# EAGLE board Y-babies ATtiny84 v03 (EAGLE 6.5.0)
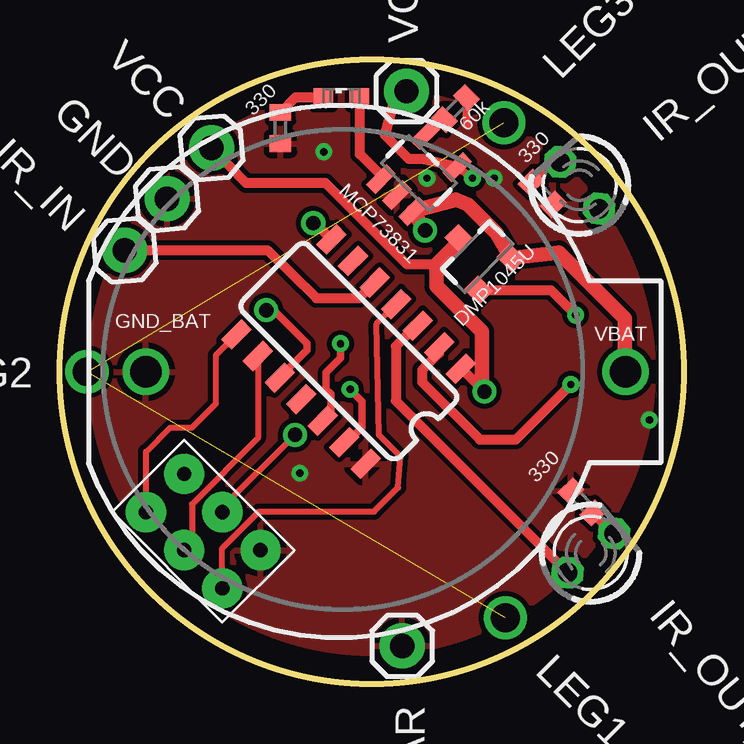
[diagram p0: board, top side]
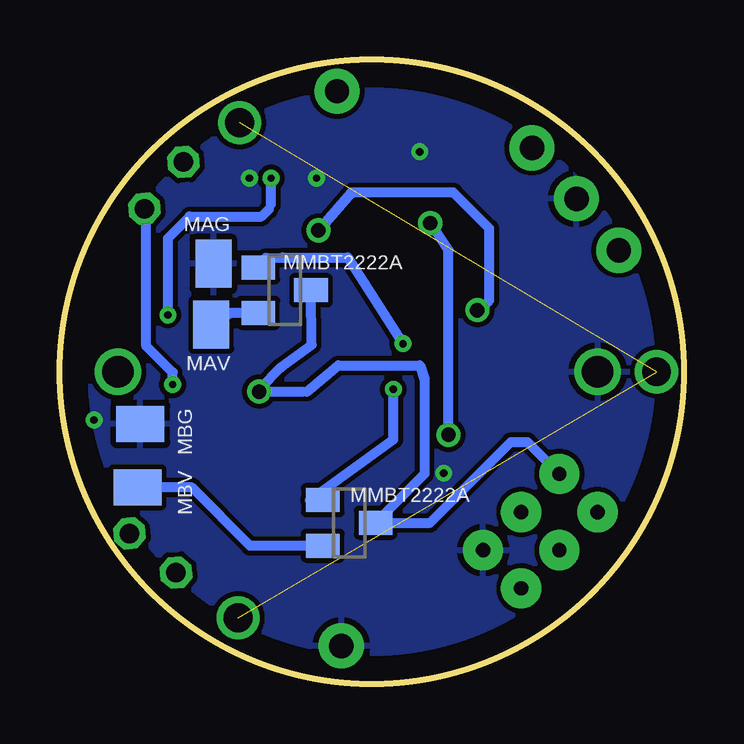
[diagram p1: board, bottom side, seen from below]

Size 26 x 26 mm. Coordinates in mm from the lower left corner, seen from the top.
Outline: circle at 13,13 radius 13
Copper layers (1*16): Top 0.035mm / dielectric 1.5mm / Bottom 0.035mm
Design rules "default": minimum track width 10mil, minimum drill 24mil, track to track 8mil, track to pad 8mil, pad to pad 8mil, via to via 8mil, smd to smd 8mil, copper to edge 40mil, drill to drill 8mil, minimum pad ring 10mil, minimum via ring 8mil, stop-mask expansion 4mil, vias tented up to drill 0mil, thermal gap 10mil

## Footprints (pad centres in the part's own frame; a part is rotated, then mirrored left to right if it is on the bottom)
BATTCOM_20MM_PTH = drill 1.3: 1 11.85,0; 2 -8.15,0
SOT23-3 = smd 0.8 x 0.9: 1 -0.95,-1; 2 0.95,-1; 3 0,1.1
1X01 = drill 1.016 pad 1.88: 1 0,0
LED3MM = drill 0.813 octagon: A -1.27,0; K 1.27,0
SML0603 = smd 0.8 x 0.8: A 0.75,0; C -0.75,0
SOT23 = smd 1 x 1.4: 1 -0.95,-1.1; 2 0.95,-1.1; 3 0,1.1
PAD-1.5X4.5 = smd 1.5 x 2: P$1 0,0
R0402 = smd 0.7 x 0.9: 1 -0.65,0; 2 0.65,0
SOT23-5 = smd 0.55 x 1.2: 1 -0.95,-1.3; 2 0,-1.3; 3 0.95,-1.3; 4 0.95,1.3; 5 -0.95,1.3
SO14 = smd 0.6 x 1.2: 1 -3.81,-2.8; 2 -2.54,-2.8; 3 -1.27,-2.8; 4 0,-2.8; 5 1.27,-2.8; 6 2.54,-2.8; 7 3.81,-2.8; 8 3.81,2.8; 9 2.54,2.8; 10 1.27,2.8; 11 0,2.8; 12 -1.27,2.8; 13 -2.54,2.8; 14 -3.81,2.8
POGO_PIN_SPI_PAD = drill 0.6 pad 1.676: GND 1,-1; MISO 3.25,-5.5; MOSI 1,-3.25; RST 3.25,-1; SCK 3.25,-3.25; VCC 1,-5.5

## Placement (x,y rotation side)
BAT1  LIR2032  [BATTCOM_20MM_PTH]  11.73,13 0 top
DMP1045U  MOSFET-PCHANNELSMD  [SOT23-3]  17.42,17.78 45 top
GND  M01PTH  [1X01]  4.46,20.22 5 top
GND_BAR  M01PTH  [1X01]  14.27,1.57 0 top
IR_IN  M01PTH  [1X01]  2.7,18.06 5 top
IR_OUT_A  [LED3MM]  22.13,5.44 40 top
IR_OUT_B  [LED3MM]  21.67,20.77 130 top
LED1  [SML0603]  11.73,24.43 0 top
MMBT2222A_L  [SOT23]  13.94,6.7 270 bottom
MMBT2222A_R  [SOT23]  16.63,16.4 270 bottom
MOT_1_A  M01SMD-4.5X1.5  [PAD-1.5X4.5]  22.65,10.82 270 bottom
MOT_1_B  M01SMD-4.5X1.5  [PAD-1.5X4.5]  22.77,8.18 270 bottom
MOT_2_A  M01SMD-4.5X1.5  [PAD-1.5X4.5]  19.69,14.96 0 bottom
MOT_2_B  M01SMD-4.5X1.5  [PAD-1.5X4.5]  19.6,17.51 0 bottom
R1  330  [R0402]  21.77,7.57 135 top
R2  330  [R0402]  20.11,20.44 315 top
R3  330  [R0402]  9.19,23.16 270 top
R4  60k  [R0402]  16.49,23.97 45 top
U1  MCP73831  [SOT23-5]  14.97,21.28 315 top
U$1  ATTINY84  [SO14]  12.04,13.84 135 top
U$2  POGO_PIN_SPI_PAD  [POGO_PIN_SPI_PAD]  9.77,5.56 225 top
VCC  M01PTH  [1X01]  6.32,22.33 5 top
VCC_BAR  M01PTH  [1X01]  14.45,24.7 0 top

## Library data of the parts
BAT1 = SparkFun-Electromechanical
DMP1045U = SparkFun-DiscreteSemi
GND GND_BAR IR_IN MMBT2222A_L MMBT2222A_R MOT_1_A MOT_1_B MOT_2_A MOT_2_B VCC VCC_BAR = SparkFun
IR_OUT_A IR_OUT_B LED1 = led
R1-R4 = resistor
U1 = SparkFun-PowerIC; PROD_ID: IC-09995
U$1 = SparkFun-DigitalIC
U$2 = Random parts

## Nets
5V: DMP1045U.1 U1.4 VCC_BAR.1
GND: BAT1.2 GND.1 GND_BAR.1 MOT_1_A.P$1 MOT_2_B.P$1 R1.2 R2.2 R3.2 R4.2 U1.2 U$1.14 U$2.GND
IR_IN: IR_IN.1 U$1.5
IR_OUT_A: IR_OUT_A.A U$1.3
IR_OUT_B: IR_OUT_B.A U$1.2
M_A_IN: MMBT2222A_R.2 MOT_2_A.P$1
M_A_SIG: MMBT2222A_R.1 U$1.12
MISO: U$1.8 U$2.MISO
MOSI: U$1.7 U$2.MOSI
MOT_B_IN: MMBT2222A_L.2 MOT_1_B.P$1
MOT_B_SIG: MMBT2222A_L.1 U$1.13
N$6: LED1.A U1.1
N$7: IR_OUT_A.K R1.1
N$8: IR_OUT_B.K R2.1
N$9: LED1.C R3.1
N$10: R4.1 U1.5
RES: U$1.4 U$2.RST
SCK: U$1.9 U$2.SCK
VBAT: BAT1.1 DMP1045U.2 U1.3 U$1.10
VCC: DMP1045U.3 MMBT2222A_L.3 MMBT2222A_R.3 U$1.1 U$2.VCC VCC.1

## Tracks (layer width: path | path; a pad name or v marks a point on that pad's centre or on a via)
5V  (via drill 0.3)
  Top 0.305: 13.9,24.15 VCC_BAR.1 | v17.2,21.07 16.8,21.37 U1.4
  Top 0.406: U1.4 15.1,21.87 14.55,21.87 13.55,22.87 13.9,24.15 | DMP1045U.1 20.47,16.4 v21.5,15.37
  Bottom 0.305: 17.3,19.77 17.2,19.97
  Bottom 0.406: v21.5,15.37 21.5,18.57 20.6,19.47 17.6,19.47 17.3,19.77 | 17.2,19.97 v17.2,21.07
GND  (via drill 0.3)
  Top 0.305: R4.2 16.95,23.32 17,23.27
  other vias: 11,22.17 24.58,10.99 10,8.77 18.1,21.07 15.3,21.07
  pour Top: -0.97,-0.97 26.97,-0.97 26.97,26.97 -0.97,26.97
  pour Bottom: -0.97,-0.97 26.97,-0.97 26.97,26.97 -0.97,26.97
IR_IN
  Top 0.406: IR_IN.1 8.65,18.06 10.69,16.07 12.47,16.07 U$1.5
IR_OUT_A
  Top 0.305: U$1.3 14.85,14.92
  Top 0.406: 14.85,14.92 14,14.07 14,11.79 IR_OUT_A.A
IR_OUT_B  (via drill 0.3)
  Top 0.305: U$1.2 15.81,13.78
  Top 0.406: 15.81,13.78 15.1,13.07 15.1,12.57 17.5,10.17 19,10.17 v21.3,12.47
  Bottom 0.406: v21.3,12.47 21.3,12.97 22.4,14.07 22.4,19.72 IR_OUT_B.A
LEG2  (via drill 1.2)  (2 unrouted)
  other vias: 1.13,13 18.52,23.38 18.57,2.74
M_A_IN
  Bottom 0.406: MMBT2222A_R.2 18.88,15.45 MOT_2_A.P$1
M_A_SIG  (via drill 0.3)
  Top 0.305: v11.7,14.17 11.7,13.57 11.1,12.97 11.1,12.27 11.3,12.07 11.3,11.31 U$1.12
  Bottom 0.406: MMBT2222A_R.1 17.42,17.75 16.7,17.77 14,17.77 v11.7,14.17
MISO
  Top 0.254: U$2.MISO 3.59,9.66 4.6,10.67 5.5,10.67 6.5,11.67 6.5,13.69 U$1.8
MOSI  (via drill 0.6)
  Top 0.254: U$2.MOSI 6.77,7.34 v9.8,10.37
  Top 0.406: v10.56,19.2 10.9,18.93 U$1.7
  Bottom 0.406: v9.8,10.37 9.8,18.07 v10.56,19.2
MOT_B_IN
  Bottom 0.305: MOT_1_B.P$1
  Bottom 0.406: MMBT2222A_L.2 18.08,5.75 20.5,8.17 MOT_1_B.P$1
MOT_B_SIG  (via drill 0.3)
  Top 0.305: U$1.13 11.99,10.06 12.6,10.67 12.6,11.77 v12.1,12.27
  Bottom 0.305: MMBT2222A_L.1 15.58,7.65
  Bottom 0.406: 15.58,7.65 12.1,10.17 v12.1,12.27
N$6
  Top 0.305: U1.1 13.38,21.19 | 12.5,24.41 LED1.A
  Top 0.406: 13.38,21.19 12.5,22.07 12.5,24.41
N$7
  Top 0.406: IR_OUT_A.K 23.08,6.26 R1.1
N$8
  Top 0.305: IR_OUT_B.K 20.49,21.75 R2.1
N$9
  Top 0.406: LED1.C 9.81,24.43 R3.1
N$10
  Top 0.305: U1.5 15.39,22.87 R4.1
RES
  Top 0.254: U$2.RST 6.77,5.64 8.3,7.17 13.1,7.17 14.1,8.17 14.2,9.47 13.3,10.37 13.2,15.01 U$1.4
SCK
  Top 0.254: U$1.9 8.26,10.23 5.5,7.47 5.5,5.88 U$2.SCK
VBAT  (via drill 0.6)
  Top 0.305: U$1.10 10.3,13.9 10.3,14.17 8.9,15.57 v8.6,15.57
  Top 0.61: BAT1.1 23.54,13 23.54,15.23 20.8,17.97 DMP1045U.2 18.2,18.77 17,19.97 16.5,20.17 U1.3 v15.22,18.89
  Bottom 0.406: v8.6,15.57 8.1,15.97 8.1,18.97 9.6,20.47 13.85,20.47 v15.22,18.89
VCC  (via drill 0.6)
  Top 0.305: U$1.1 16.74,13.13
  Top 0.406: 16.74,13.13 v17.7,12.17 | 15.7,17.47 14.47,17.47 11.07,20.87 7.76,20.87 VCC.1
  Top 0.61: DMP1045U.3 16.64,18.41 15.7,17.47 15.7,16.57 17.6,14.67 17.6,12.27 v17.7,12.17
  Bottom 0.305: 17.71,12.33 17.75,12.27 v17.7,12.17 15.9,12.17 15.7,12.17
  Bottom 0.406: 17.71,12.33 17.64,12.33 16.8,13.17 15.51,14.12 MMBT2222A_R.3 | 15.7,12.17 14.4,13.27 11,13.27 10.8,12.67 10.8,8.74 MMBT2222A_L.3 10.57,6.7 7.2,10.07 6.51,10.07 U$2.VCC | 17.9,12.17 15.9,12.17

## Text on the board
_tsilk: LEG3 | 60k | 330 | 330 | DMP1045U | MCP73831 | GND_BAT | VBAT | LEG2 | 330 | LEG1
_bsilk: MAG | MMBT2222A | MAV | MBG | MBV | MMBT2222A